# Altium PCB er9x.PcbDoc (part 1 of 2)
Units mm, origin at the board's own origin, x right, y up, seen from the top; angles counter-clockwise.
Board outline 182 x 126 mm, 2 copper layers (Top Layer, Bottom Layer); 144 components, 111 nets, 454 pads, 137 vias.
Unrouted connection lines stored in the file: 3.
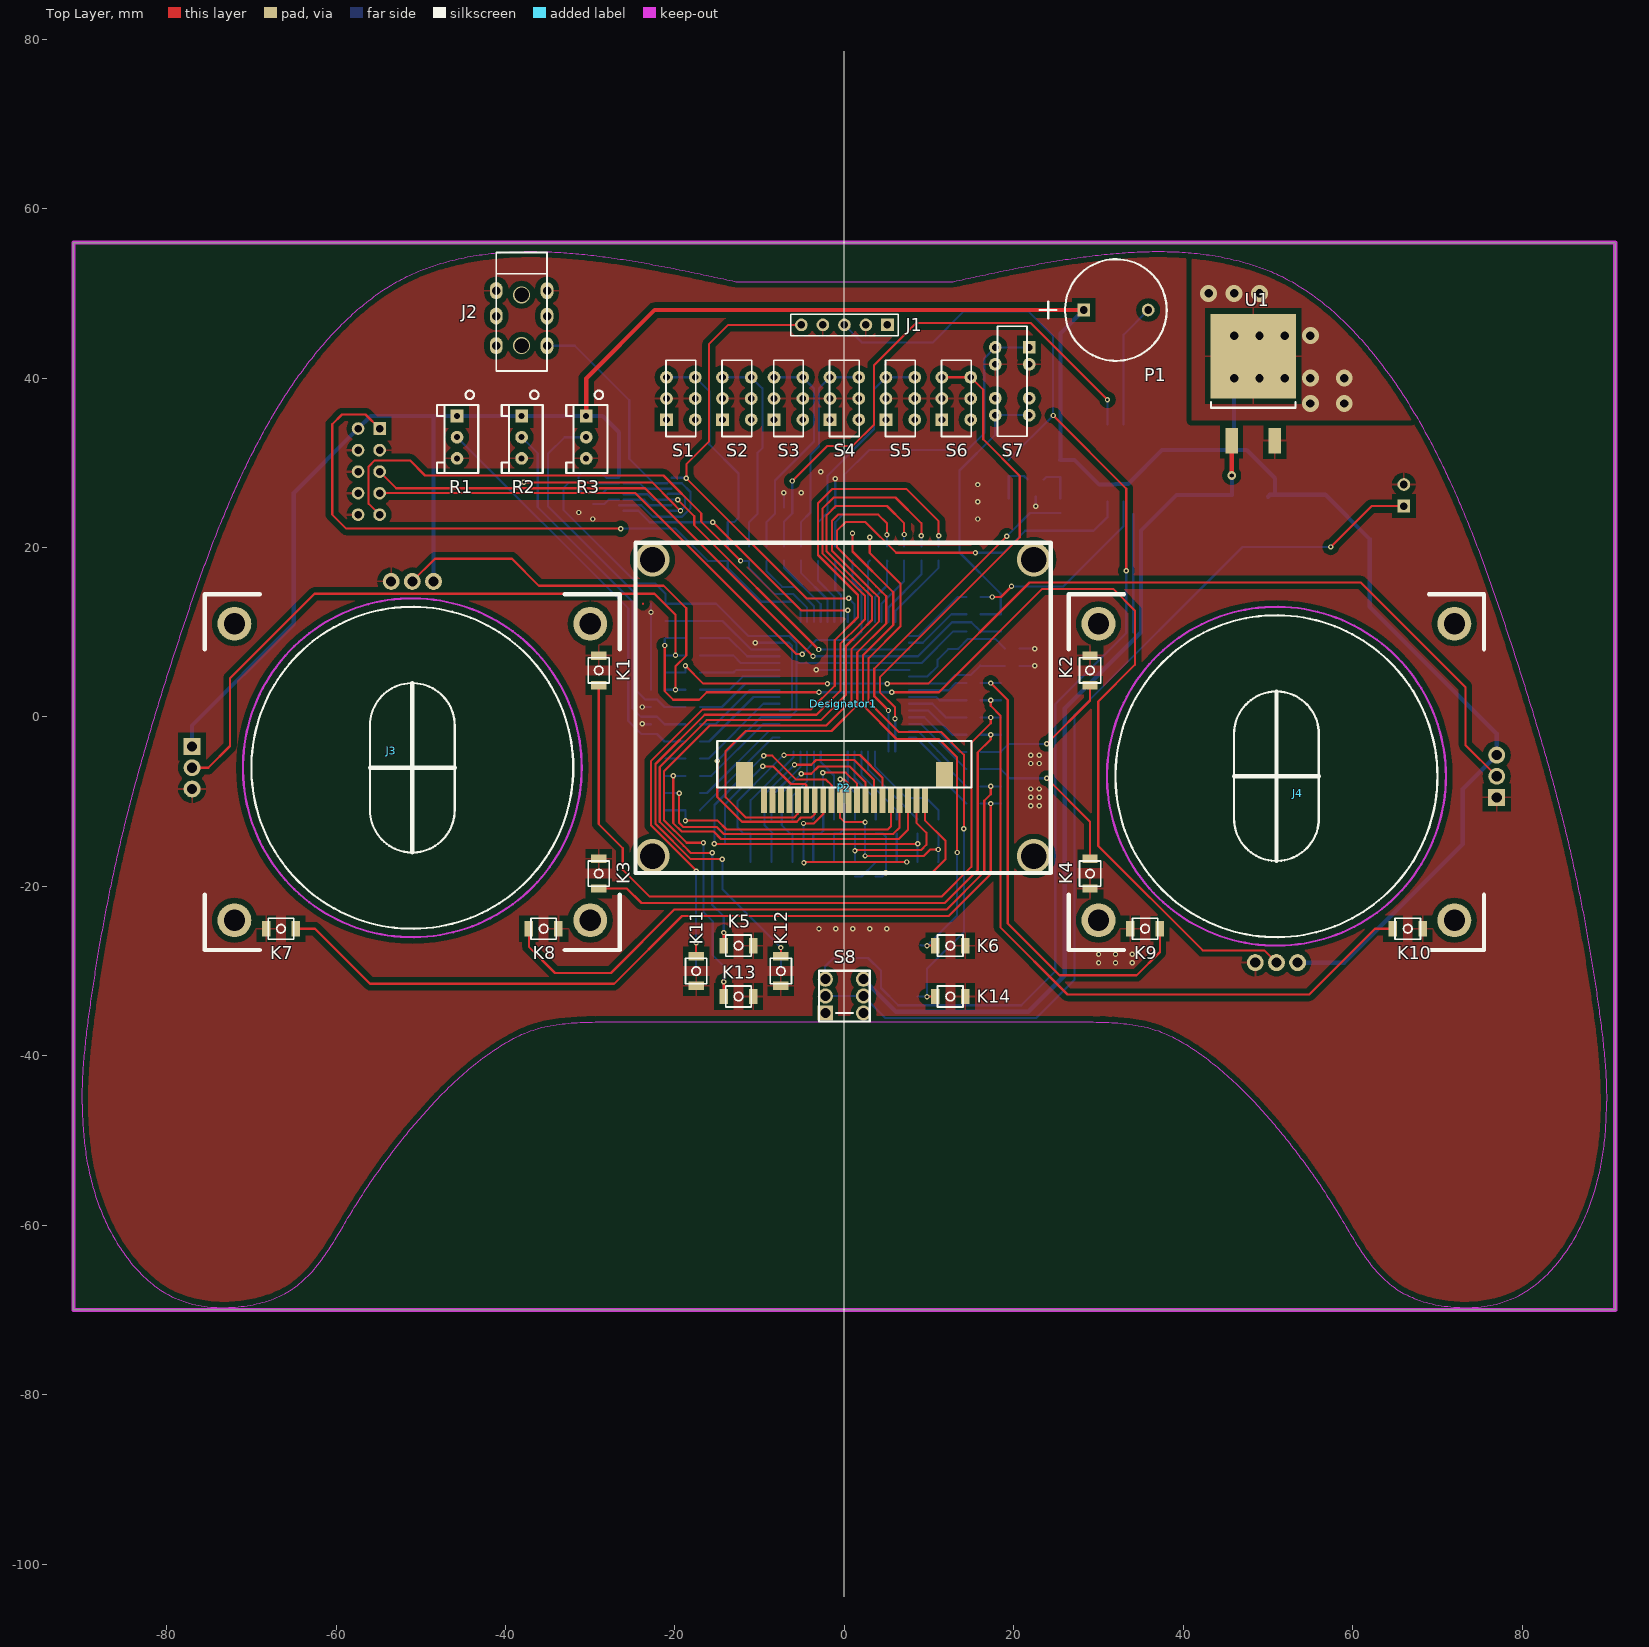
[diagram p0: Top Layer view]
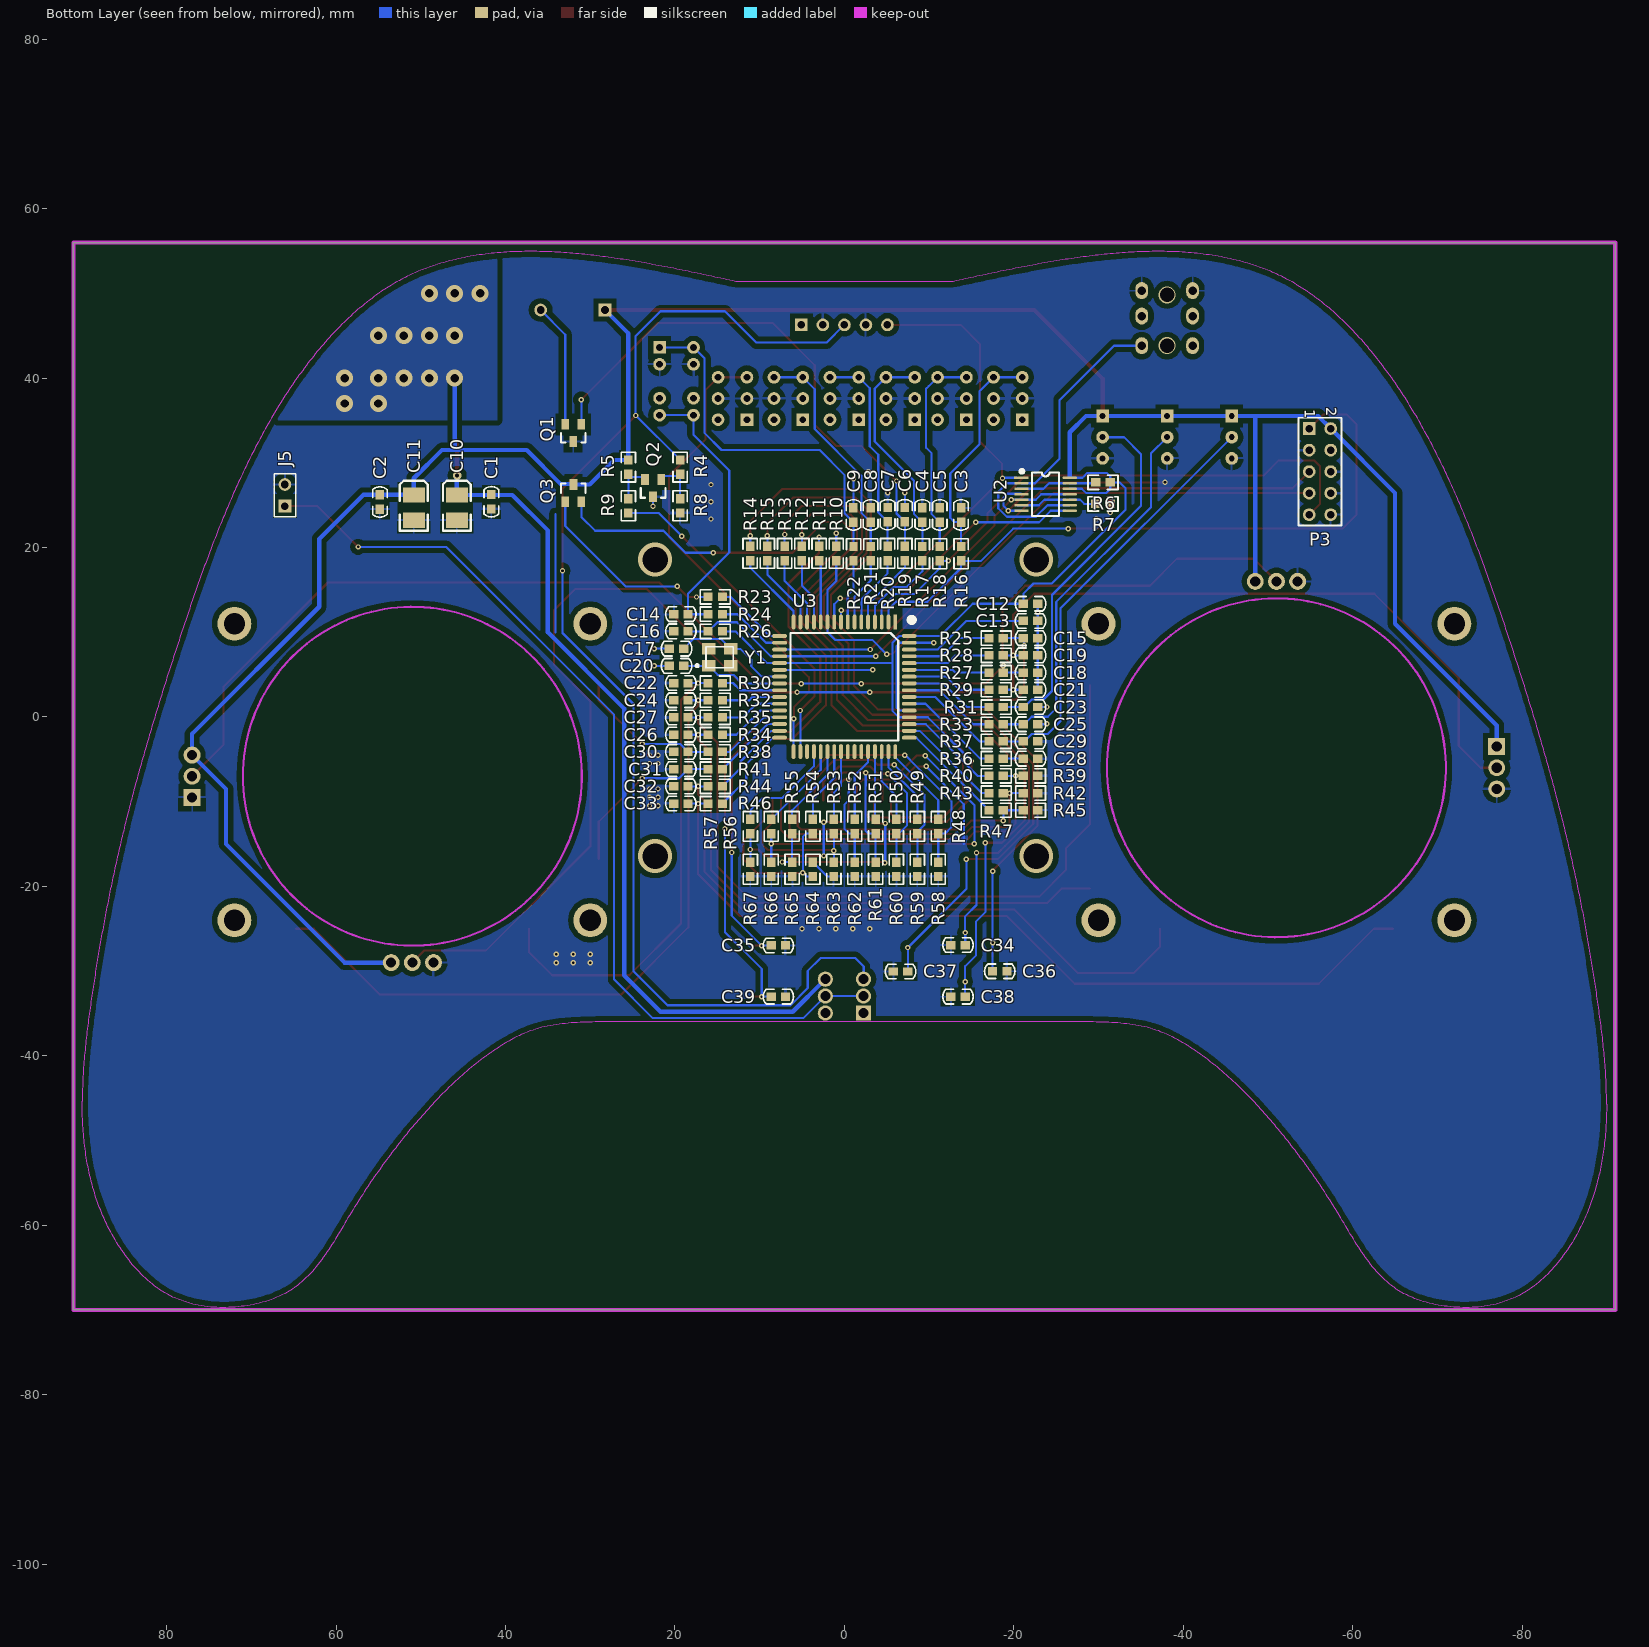
[diagram p1: Bottom Layer view, seen from below]

## Layer stack, top to bottom
Top Layer: signal copper 0.0356
Dielectric: dielectric 0.32, FR-4, Dk 4.8
Bottom Layer: signal copper 0.0356

## Board outline
-91,56 -91,-70 91,-70 91,56

## Design rules (kind name [scope] priority, off if disabled: settings)
Clearance Clearance_1 [InPolygon] p1: gap=0.635
Clearance [All] p2: gap=0.254
PolygonConnect PolygonConnect_1 [IsVia] p1: connectstyle=Direct reliefconductorwidth=0.254 reliefentries=4 polygonreliefangle="90 Angle"
PolygonConnect [All] p2: connectstyle=Relief reliefconductorwidth=0.254 reliefentries=4 polygonreliefangle="90 Angle"
RoomDefinition Sheet1 [InComponentClass('Sheet1')] p1: confinementstyle=ConfineIn formatcopy=TRUE lockcomponents=FALSE outline -1498.514,-1331.828 -1447.714,-1331.828 -1447.714,-1306.428 -1498.514,-1306.428
RoutingVias [All] p1: holewidth=0.711 width=1.27 viastyle="Through Hole" minholewidth=0.254 minwidth=0.254 maxholewidth=2.54 maxwidth=2.54
SilkscreenOverComponentPads [All] p1: minsilkscreentomaskgap=0.254
SolderMaskExpansion [All] p1: expansion=0.102
Width [All] p1: maxlimit=2.54 minlimit=0.254 preferedwidth=0.254
27 further rules are at their usual default settings.

## Components (designator, comment, footprint, x,y, rotation, side; value= is the part's Value field where it differs from the comment)
C1 "0.1uF" 0603C 41.671,25.4 r90 bottom (schematic designator C3)
C2 "0.1uF" 0603C 54.828,25.375 r90 bottom (schematic designator C4)
C3 "2.2uF" 0603C -13.772,23.844 r270 bottom (schematic designator C24)
C4 "2.2uF" 0603C -9.2,23.844 r270 bottom (schematic designator C26)
C5 "2.2uF" 0603C -11.257,23.844 r270 bottom (schematic designator C25)
C6 "2.2uF" 0603C -7.136,23.876 r270 bottom (schematic designator C27)
C7 "2.2uF" 0603C -5.104,23.876 r270 bottom (schematic designator C28)
C8 "2.2uF" 0603C -3.104,23.844 r270 bottom (schematic designator C29)
C9 "2.2uF" 0603C -1.072,23.844 r270 bottom (schematic designator C31)
C10 "4.7uF" B 45.749,24.708 r90 bottom (schematic designator C1)
C11 "4.7uF" B 50.829,24.708 r90 bottom (schematic designator C2)
C12 "0.1uF" 0603C -21.976,13.364 r0 bottom (schematic designator C15)
C13 "0.1uF" 0603C -21.976,11.332 r0 bottom (schematic designator C19)
C14 "2.2uF" 0603C 19.304,12.128 r180 bottom (schematic designator C30)
C15 "2.2uF" 0603C -21.976,9.3 r0 bottom (schematic designator C11)
C16 "0.1uF" 0603C 19.304,10.096 r180 bottom (schematic designator C12)
C17 "30pF" 0603C 19.812,8.064 r0 bottom
C18 "2.2uF" 0603C -21.976,5.236 r0 bottom (schematic designator C14)
C19 "2.2uF" 0603C -21.976,7.268 r0 bottom (schematic designator C13)
C20 "30pF" 0603C 19.812,6.032 r180 bottom (schematic designator C22)
C21 "2.2uF" 0603C -21.976,3.204 r0 bottom (schematic designator C16)
C22 "2.2uF" 0603C 19.304,4 r180 bottom (schematic designator C32)
C23 "2.2uF" 0603C -21.976,1.172 r0 bottom (schematic designator C18)
C24 "2.2uF" 0603C 19.304,1.968 r180 bottom (schematic designator C33)
C25 "2.2uF" 0603C -21.976,-0.86 r0 bottom (schematic designator C20)
C26 "2.2uF" 0603C 19.304,-2.096 r180 bottom (schematic designator C35)
C27 "2.2uF" 0603C 19.304,-0.064 r180 bottom (schematic designator C34)
C28 "2.2uF" 0603C -21.976,-4.924 r0 bottom (schematic designator C23)
C29 "2.2uF" 0603C -21.976,-2.892 r0 bottom (schematic designator C21)
C30 "2.2uF" 0603C 19.304,-4.128 r180 bottom (schematic designator C36)
C31 "2.2uF" 0603C 19.304,-6.16 r180 bottom (schematic designator C37)
C32 "2.2uF" 0603C 19.304,-8.192 r180 bottom (schematic designator C38)
C33 "2.2uF" 0603C 19.304,-10.224 r180 bottom (schematic designator C39)
C34 "2.2uF" 0603C -13.411,-26.924 r0 bottom (schematic designator C8)
C35 "2.2uF" 0603C 7.798,-26.975 r180 bottom (schematic designator C5)
C36 "2.2uF" 0603C -18.339,-30.023 r180 bottom (schematic designator C10)
C37 "2.2uF" 0603C -6.629,-30.048 r0 bottom (schematic designator C9)
C38 "2.2uF" 0603C -13.411,-33.02 r0 bottom (schematic designator C7)
C39 "2.2uF" 0603C 7.798,-33.02 r180 bottom (schematic designator C6)
Designator1 "Comment" LCD3 -0.152,1.575 r180 top locked
J1 "RF" HDR1X5 5.08,46.279 r180 top (schematic designator J6)
J2 "TRAINER" PJ-393 -38.1,52.324 r270 top (schematic designator J5)
J3 "Joystick" BIG -51,-6 r180 top locked (schematic designator J1)
J4 "Joystick" BIG 51,-7 r0 top locked (schematic designator J2)
J5 "BAT" HDR1X2 66.04,24.892 r90 bottom (schematic designator J7)
K1 "SW-PB" KEY -29,5.5 r90 top (schematic designator K2)
K2 "SW-PB" KEY 29,5.5 r90 top (schematic designator K1)
K3 "SW-PB" KEY -29,-18.5 r270 top
K4 "SW-PB" KEY 29,-18.5 r90 top
K5 "SW-PB" KEY -12.5,-27 r0 top (schematic designator K9)
K6 "SW-PB" KEY 12.5,-27 r0 top (schematic designator K10)
K7 "SW-PB" KEY -66.5,-25 r180 top (schematic designator K5)
K8 "SW-PB" KEY -35.5,-25 r180 top (schematic designator K6)
K9 "SW-PB" KEY 35.5,-25 r0 top (schematic designator K7)
K10 "SW-PB" KEY 66.5,-25 r0 top (schematic designator K8)
K11 "SW-PB" KEY -17.5,-30 r270 top (schematic designator K12)
K12 "SW-PB" KEY -7.5,-30 r270 top (schematic designator K11)
K13 "SW-PB" KEY -12.5,-33 r0 top (schematic designator K14)
K14 "SW-PB" KEY 12.5,-33 r0 top (schematic designator K13)
P1 "BEEP" BEEP 32.055,48.031 r90 top (schematic designator P5)
P2 "LCD" FPC 0,-8.331 r180 top locked (schematic designator P3)
P3 "Header 5X2" HDR2X5 -54.864,34.036 r270 bottom (schematic designator P4)
Q1 "NPN" SOT-23 32.004,33.528 r90 bottom (schematic designator Q3)
Q2 "NPN" SOT-23 22.58,27.01 r90 bottom
Q3 "PNP" SOT-23 32.004,26.416 r270 bottom (schematic designator Q1)
R1 "RPot SM" 3296 -45.72,33.02 r270 top
R2 "RPot SM" 3296 -38.1,33.02 r270 top (schematic designator R3)
R3 "RPot SM" 3296 -30.48,33.02 r270 top (schematic designator R2)
R4 "150K" 0603R 19.392,29.49 r270 bottom (schematic designator R50)
R5 "10K" 0603R 25.488,29.49 r90 bottom (schematic designator R42)
R6 "200R" 0603R -30.528,27.686 r180 bottom (schematic designator R70)
R7 "200R" 0603R -30.528,25.146 r180 bottom (schematic designator R71)
R8 "100K" 0603R 19.392,24.918 r270 bottom (schematic designator R56)
R9 "0R" 0603R 25.488,24.918 r90 bottom (schematic designator R49)
R10 "200R" 0603R 0.96,19.304 r90 bottom (schematic designator R32)
R11 "200R" 0603R 2.992,19.304 r90 bottom (schematic designator R34)
R12 "200R" 0603R 5.024,19.304 r90 bottom (schematic designator R36)
R13 "200R" 0603R 7.056,19.304 r90 bottom (schematic designator R38)
R14 "200R" 0603R 11.12,19.304 r90 bottom (schematic designator R41)
R15 "200R" 0603R 9.088,19.304 r90 bottom (schematic designator R39)
R16 "200R" 0603R -13.772,19.272 r270 bottom (schematic designator R40)
R17 "200R" 0603R -9.204,19.276 r270 bottom (schematic designator R45)
R18 "200R" 0603R -11.261,19.276 r270 bottom (schematic designator R43)
R19 "1K" 0603R -7.136,19.304 r270 bottom (schematic designator R46)
R20 "200R" 0603R -5.104,19.304 r270 bottom (schematic designator R48)
R21 "200R" 0603R -3.108,19.276 r270 bottom (schematic designator R51)
R22 "200R" 0603R -1.076,19.276 r270 bottom (schematic designator R52)
R23 "200R" 0603R 15.24,14.16 r0 bottom (schematic designator R44)
R24 "200R" 0603R 15.24,12.128 r0 bottom (schematic designator R53)
R25 "200R" 0603R -17.912,9.3 r0 bottom (schematic designator R57)
R26 "10K" 0603R 15.24,10.096 r0 bottom (schematic designator R17)
R27 "200R" 0603R -17.912,5.236 r0 bottom (schematic designator R60)
R28 "200R" 0603R -17.912,7.268 r0 bottom (schematic designator R58)
R29 "200R" 0603R -17.912,3.204 r0 bottom (schematic designator R62)
R30 "200R" 0603R 15.24,4 r180 bottom (schematic designator R24)
R31 "200R" 0603R -17.912,1.172 r0 bottom (schematic designator R64)
R32 "200R" 0603R 15.24,1.968 r180 bottom (schematic designator R26)
R33 "200R" 0603R -17.912,-0.86 r0 bottom (schematic designator R66)
R34 "200R" 0603R 15.24,-2.096 r180 bottom (schematic designator R29)
R35 "200R" 0603R 15.24,-0.064 r180 bottom (schematic designator R28)
R36 "200R" 0603R -17.912,-4.924 r0 bottom (schematic designator R69)
R37 "200R" 0603R -17.912,-2.892 r0 bottom (schematic designator R68)
R38 "200R" 0603R 15.24,-4.128 r180 bottom (schematic designator R31)
R39 "10K" 0603R -21.976,-6.956 r180 bottom (schematic designator R4)
R40 "200R" 0603R -17.912,-6.956 r180 bottom (schematic designator R18)
R41 "200R" 0603R 15.24,-6.16 r180 bottom (schematic designator R33)
R42 "10K" 0603R -21.976,-8.988 r180 bottom (schematic designator R5)
R43 "200R" 0603R -17.912,-8.988 r180 bottom (schematic designator R19)
R44 "200R" 0603R 15.24,-8.192 r180 bottom (schematic designator R35)
R45 "10K" 0603R -21.976,-11.02 r180 bottom (schematic designator R6)
R46 "200R" 0603R 15.24,-10.224 r180 bottom (schematic designator R37)
R47 "200R" 0603R -17.912,-11.02 r180 bottom (schematic designator R20)
R48 "200R" 0603R -11.074,-12.924 r270 bottom (schematic designator R21)
R49 "200R" 0603R -8.61,-12.924 r270 bottom (schematic designator R22)
R50 "200R" 0603R -6.146,-12.924 r270 bottom (schematic designator R23)
R51 "200R" 0603R -3.682,-12.924 r270 bottom (schematic designator R25)
R52 "200R" 0603R -1.218,-12.924 r270 bottom (schematic designator R27)
R53 "200R" 0603R 1.245,-12.924 r270 bottom (schematic designator R67)
R54 "200R" 0603R 3.709,-12.924 r270 bottom (schematic designator R65)
R55 "200R" 0603R 6.173,-12.924 r270 bottom (schematic designator R63)
R56 "200R" 0603R 8.637,-12.924 r270 bottom (schematic designator R61)
R57 "200R" 0603R 11.101,-12.924 r270 bottom (schematic designator R59)
R58 "10K" 0603R -11.074,-17.988 r270 bottom (schematic designator R7)
R59 "10K" 0603R -8.61,-17.988 r270 bottom (schematic designator R8)
R60 "10K" 0603R -6.146,-17.988 r270 bottom (schematic designator R9)
R61 "10K" 0603R -3.682,-17.988 r270 bottom (schematic designator R10)
R62 "10K" 0603R -1.218,-17.988 r270 bottom (schematic designator R11)
R63 "10K" 0603R 1.245,-17.988 r270 bottom (schematic designator R16)
R64 "10K" 0603R 3.709,-17.988 r90 bottom (schematic designator R15)
R65 "10K" 0603R 6.173,-17.988 r270 bottom (schematic designator R14)
R66 "10K" 0603R 8.637,-17.988 r270 bottom (schematic designator R13)
R67 "10K" 0603R 11.101,-17.988 r270 bottom (schematic designator R12)
S1 "THR" 2235D -19.304,37.592 r0 top (schematic designator S5)
S2 "AIL" 2235D -12.7,37.592 r0 top (schematic designator S1)
S3 "ELE" 2235D -6.604,37.592 r0 top
S4 "GER" 2235D 0,37.592 r0 top (schematic designator S2)
S5 "TRN" 2235D 6.604,37.592 r0 top (schematic designator S6)
S6 "RDU" 2235D 13.208,37.592 r0 top (schematic designator S4)
S7 "ID" 2336D 19.812,39.624 r270 top
S8 "SW7" LOCK 0,-32.952 r180 top
U1 "7805" TO-263 48.26,37.592 r270 top locked (schematic designator U2)
U2 "HC4066" TSSOP-14 -23.749,26.289 r270 bottom (schematic designator U4)
U3 "ATmega128A" LQFP-64 0,3.556 r0 bottom locked
Y1 "16Mhz" 3225 14.732,7.048 r180 bottom

## Footprints (in the part's own frame and the unit in brackets; to place one, negate y for a bottom-side part, rotate by r counter-clockwise, add the part's x,y. Pads: shape width x height; smd on the part's side, far side on the other; paste and mask are expansions set on the pad)
0603C [mm]
  rect 1.1x1 smd: 1(0.85,0) 2(-0.85,0)
  silkscreen extent -1.79,-0.86 1.79,0.86
0603R [mm]
  rect 1.1x1 smd: 1(0.85,0) 2(-0.85,0)
  silkscreen extent -1.77,-0.84 1.77,0.84
2235D [mm]
  rect 1.5x1.5 hole 0.8: 1(-1.7,-2.5)
  round 1.5 hole 0.8: 1(1.7,-2.5) 2(-1.7,0) 2(1.7,0) 3(-1.7,2.5) 3(1.7,2.5)
  silkscreen extent -1.75,-4.5 1.75,4.5
2336D [mm]
  rect 1.5x1.5 hole 0.8: 1(-4,2)
  round 1.5 hole 0.8: 1(-4,-2) 2(-2,2) 2(-2,-2) 3(2,2) 3(2,-2) 4(4,2) 4(4,-2)
  silkscreen extent -6.5,-1.75 6.5,1.75
3225 [mm]
  rect 1.6x1.4 smd: 1(-1.3,-1) 2(1.3,-1) 3(1.3,1) 4(-1.3,1)
  silkscreen extent -2.8,-1.25 1.6,1.25
3296 [mm]
  rect 1.5x1.5 hole 0.7: 1(-2.5,0)
  round 1.5 hole 0.7: 2(0,0) 3(2.5,0)
  silkscreen extent -5.5,-2.35 4.21,2.5
B [mm]
  rect 1.8x2.6 smd: 1(1.5,0) 2(-1.5,0)
  silkscreen extent -2.73,-1.65 3.16,1.65
BEEP [mm]
  rect 1.5x1.5 hole 0.9: 1(0,3.8)
  round 1.5 hole 0.9: 2(0,-3.8)
  silkscreen extent -6,-6 6,9
BIG [mm]
  round 4 hole 2.5: 0(-21,18) 0(-21,-17) 0(21,18) 0(21,-17)
  rect 2x2 hole 1.2: 1(26,-2.5)
  round 2 hole 1.2: 2(26,0) 3(26,2.5) 4(2.5,-22) 5(0,-22) 6(-2.5,-22)
  Keep-Out Layer circle w0.254: c0,0 r20
  silkscreen extent -24.5,-20.5 24.5,21.5
FPC [mm]
  rect 2x3 smd: 0(-11.8,-1.5) 0(11.8,-1.5)
  rect 0.7x3 smd: 1(9.5,1.5) 2(8.5,1.5) 3(7.5,1.5) 4(6.5,1.5) 5(5.5,1.5) 6(4.5,1.5) 7(3.5,1.5) 8(2.5,1.5) 9(1.5,1.5) 10(0.5,1.5) 11(-0.5,1.5) 12(-1.5,1.5) 13(-2.5,1.5) 14(-3.5,1.5) 15(-4.5,1.5) 16(-5.5,1.5) 17(-6.5,1.5) 18(-7.5,1.5) 19(-8.5,1.5) 20(-9.5,1.5)
  silkscreen extent -15,-5.5 15,0
HDR1X2 [mm] "Connector; Header; 2 Position"
  rect 1.5x1.5 hole 0.9: 1(0,0)
  round 1.5 hole 0.9: 2(2.54,0)
  silkscreen extent -1.27,-1.27 3.81,1.27
HDR1X5 [mm] "Connector; Header; 5 Position"
  rect 1.5x1.5 hole 0.9: 1(0,0)
  round 1.5 hole 0.9: 2(2.54,0) 3(5.08,0) 4(7.62,0) 5(10.16,0)
  silkscreen extent -1.27,-1.27 11.43,1.27
HDR2X5 [mm] "Connector; Header; 5x2 Position"
  rect 1.5x1.5 hole 0.9: 1(0,0)
  round 1.5 hole 0.9: 2(0,2.54) 3(2.54,0) 4(2.54,2.54) 5(5.08,0) 6(5.08,2.54) 7(7.62,0) 8(7.62,2.54) 9(10.16,0) 10(10.16,2.54)
  silkscreen extent -1.27,-1.27 11.43,3.81
KEY [mm]
  rect 1x1.8 smd: 1(-1.75,0) 2(1.75,0)
  silkscreen extent -1.5,-1.25 1.5,1.25
LCD3 [mm]
  silkscreen extent -24.5,-19 24.5,20
LOCK [mm]
  rect 1.8x1.8 hole 1.2: 1(2.25,2)
  round 1.8 hole 1.2: 2(2.25,0) 3(2.25,-2) 4(-2.25,2) 5(-2.25,0) 6(-2.25,-2)
  silkscreen extent -3,-3 3,3
LQFP-64 [mm]
  rect 0.45x1.75 smd: 1(-6,-7.65)
  oval 0.45x1.75 smd: 2(-5.2,-7.65) 3(-4.4,-7.65) 4(-3.6,-7.65) 5(-2.8,-7.65) 6(-2,-7.65) 7(-1.2,-7.65) 8(-0.4,-7.65) 9(0.4,-7.65) 10(1.2,-7.65) 11(2,-7.65) 12(2.8,-7.65) 13(3.6,-7.65) 14(4.4,-7.65) 15(5.2,-7.65) 16(6,-7.65) 33(6,7.65) 34(5.2,7.65) 35(4.4,7.65) 36(3.6,7.65) 37(2.8,7.65) 38(2,7.65) 39(1.2,7.65) 40(0.4,7.65) 41(-0.4,7.65) 42(-1.2,7.65) 43(-2,7.65) 44(-2.8,7.65) 45(-3.6,7.65) 46(-4.4,7.65) 47(-5.2,7.65) 48(-6,7.65)
  oval 1.75x0.45 smd: 17(7.65,-6) 18(7.65,-5.2) 19(7.65,-4.4) 20(7.65,-3.6) 21(7.65,-2.8) 22(7.65,-2) 23(7.65,-1.2) 24(7.65,-0.4) 25(7.65,0.4) 26(7.65,1.2) 27(7.65,2) 28(7.65,2.8) 29(7.65,3.6) 30(7.65,4.4) 31(7.65,5.2) 32(7.65,6) 49(-7.65,6) 50(-7.65,5.2) 51(-7.65,4.4) 52(-7.65,3.6) 53(-7.65,2.8) 54(-7.65,2) 55(-7.65,1.2) 56(-7.65,0.4) 57(-7.65,-0.4) 58(-7.65,-1.2) 59(-7.65,-2) 60(-7.65,-2.8) 61(-7.65,-3.6) 62(-7.65,-4.4) 63(-7.65,-5.2) 64(-7.65,-6)
  silkscreen extent -8.25,-8.2 6.35,6.35
PJ-393 [mm]
  oval 2x1.5 hole 1: 1(8.5,-3) 1(8.5,3) 2(5,3) 2(5,-3) 3(2,3) 3(2,-3)
  silkscreen extent -2.5,-3 11.5,3
SOT-23 [mil]
  rect 50x36 smd: 1(40,-37.5) 2(40,37.5) 3(-40,0.5)
  silkscreen extent -45,-58 0,58
TO-263 [mm]
  rect 3x1.5 smd: 1(5,-2.54) 3(5,2.54)
  rect 10x10.1 smd: 2(-5,0)
  silkscreen extent 0.4,-5 1.1,5
TSSOP-14 [mm]
  rect 0.32x1.7 smd: 1(-1.95,-2.85)
  oval 0.32x1.7 smd: 2(-1.3,-2.85) 3(-0.65,-2.85) 4(0,-2.85) 5(0.65,-2.85) 6(1.3,-2.85) 7(1.95,-2.85) 8(1.95,2.85) 9(1.3,2.85) 10(0.65,2.85) 11(0,2.85) 12(-0.65,2.85) 13(-1.3,2.85) 14(-1.95,2.85)
  silkscreen extent -2.9,-3 2.55,1.6

## Part data
C1 C2 C17 C20: library part CAP, "Capacitor"
C3 C4 C5 C6 C7 C8 C9 C12 C13 C14 C15 C18 C19 C21 C22 C23 C24 C25 C26 C27 C28 C29 C30 C31 C32 C33 C34 C35 C36 C37 C38 C39: library part Cap, "Capacitor"
C10 C11 C16: library part "Cap Pol1", "Polarized Capacitor (Radial)"
J1: library part "Header 5", "Header, 5-Pin"
J2: library part "Header 3", "Header, 3-Pin"
J3 J4: library part "RPot SM_1", "Square Trimming Potentiometer"
J5: library part "Header 2", "Header, 2-Pin"
K1 K2 K3 K4 K5 K6 K7 K8 K9 K10 K11 K12 K13 K14: "Switch"
P1: library part Speaker, "Loudspeaker"
P2: library part "Header 20", "Header, 20-Pin"
P3: "Header, 5-Pin, Dual row"
Q1 Q2: "NPN Bipolar Transistor"
Q3: "PNP Bipolar Transistor"
R1 R2 R3: "Square Trimming Potentiometer"
R4 R5 R6 R7 R8 R9 R10 R11 R12 R13 R14 R15 R16 R17 R18 R19 R20 R21 R22 R23 R24 R25 R26 R27 R28 R29 R30 R31 R32 R33 R34 R35 R36 R37 R38 R39 R40 R41 R42 R43 R44 R45 R46 R47 R48 R49 R50 R51 R52 R53 R54 R55 R56 R57 R58 R59 R60 R61 R62 R63 R64 R65 R66 R67: library part Res2, "Resistor"
S1 S2 S3 S4 S5 S6 S8: library part SW-SPDT, "SPDT Subminiature Toggle Switch, Right Angle Mounting, Vertical Actuation"
S7: library part "SW DPDT", "Switch"
U1: "Header, 3-Pin, Dual row"
U3: library part ATmega128L-8MC, "8-Bit AVR Microcontroller with 128K Bytes of In-System Programmable Flash Memory"
Y1: library part XTAL, "Crystal Oscillator"

## Via types
v1: diameter 0.635, hole 0.305, Top Layer to Bottom Layer, 83 vias
v2: diameter 0.635, hole 0.305, Top Layer to Bottom Layer, tented both sides, 33 vias
v3: diameter 2, hole 1, Top Layer to Bottom Layer, tented both sides, 13 vias
v4: diameter 4, hole 3, Top Layer to Bottom Layer, 4 vias
v5: diameter 2, hole 1.7, Top Layer to Bottom Layer, 2 vias
v6: diameter 1.016, hole 0.508, Top Layer to Bottom Layer, 1 vias
v7: diameter 2, hole 1, Top Layer to Bottom Layer, 1 vias

## Nets (pads, with @x,y where several pads share a name; then routed paths per layer and width w, separated by ;. In a path a pad name is that pad's centre, name@x,y a point inside that pad or via, vN(x,y) a via of type N, cw(c..) or ccw(c..) an arc to the next point about the centre after c; other vN are vias at no path point)
AILDRSW: C5.1 R18.2 S2.3 | length 25
  Bottom Layer w0.254: S2.3@-14.4,40.092 S2.3@-11,40.092 -9.954,39.046 ; R18.2@-11.261,20.126 -11.261,22.99 C5.1@-11.257,22.994 -10.262,23.99 -10.262,31.166 -9.652,31.775 -9.652,38.744 -9.954,39.046 ; -9.7,38.792 -9.954,39.046
ANT: J1.1
BACKLIGHT: Q3.1 R23.1 | length 23.3
  Top Layer w0.254: v1(17.462,14.16) 18.478,14.16 v1(19.724,15.406) v1@19.812,15.494
  Bottom Layer w0.254: R23.1@16.09,14.16 v1(17.462,14.16) ; v1(19.724,15.406) 25.82,15.406 32.956,22.543 Q3.1@32.956,25.4
BATTERY: C28.1 R36.2 | length 2.4
  Bottom Layer w0.254: C28.1@-21.126,-4.924 R36.2@-18.762,-4.924
BUZZER: C6.1 Q1.1 R19.2 | length 63.8
  Top Layer w0.254: v1(-6.147,27.853) -2,32 1,32 3.5,34.5 3.5,41.524 8.476,46.5 22,46.5 v1(31.051,37.449)
  Bottom Layer w0.254: R19.2@-7.136,20.154 C6.1@-7.136,23.026 -6.147,24.015 v1(-6.147,27.853) ; Q1.1@31.051,34.544 v1(31.051,37.449)
CHARBE: S8.4
DOWN: C38.2 K13.1 R12.1 | length 92.7
  Top Layer w0.254: v1@-16.891,-14.859 -18.607,-14.859 -21.285,-12.181 -21.285,-6.426 -15.875,-1.016 -2.159,-1.016 0.857,2 ; K13.1@-14.25,-33 v1(-14.25,-31.243) ; 0.857,2.116 0.857,8.039 4.102,11.284 4.102,12.192 4.102,14.055 3.11,15.048 ; 3.316,14.841 3.11,15.048 ; v1(5.024,21.519) 5.024,22.86 4.008,23.876 -0.762,23.876 -1.467,23.171 -1.467,19.625 3.11,15.048
  Bottom Layer w0.254: v1(-16.637,-14.859) -16.637,-23.038 -15.545,-24.13 -15.545,-28.118 -14.25,-29.413 v1(-14.25,-31.243) -14.25,-33.009 C38.2@-14.261,-33.02 ; R12.1@5.024,20.154 v1(5.024,21.519)
ELEDRSW: C4.1 R17.2 S3.3 | length 26.2
  Bottom Layer w0.254: R17.2@-9.2,20.13 C4.1@-9.2,22.994 -8.2,23.994 -8.2,27.9 -3.581,32.519 -3.581,38.769 S3.3@-4.904,40.092 S3.3@-8.304,40.092
EXIT: C39.2 K14.1 R11.1 | length 71.9
  Top Layer w0.254: v1(2.992,21.209) 2.992,19.36 6.604,15.748 6.604,10.668 2.857,6.921 2.857,1.798 4.535,0.12 ; 3.048,1.607 4.535,0.12 ; v1(9.754,-33.02) 10.73,-33.02 K14.1@10.75,-33 ; v1(14.1,-13.2) 14.1,-4.448 11.43,-1.778 6.433,-1.778 4.535,0.12
  Bottom Layer w0.254: R11.1@2.992,20.154 v1(2.992,21.209) ; C39.2@8.648,-33.02 v1(9.754,-33.02) 9.754,-29.743 14.1,-25.397 v1(14.1,-13.2)
EXT_PWR: J5.1 S8.2 S8.5 | length 112.8
  Top Layer w0.254: v1(57.404,20.066) 62.23,24.892 J5.1@66.04,24.892
  Bottom Layer w0.254: S8.2@-2.286,-32.766 -2.1,-32.952 S8.5@2.25,-32.952 4.854,-35.555 22.611,-35.555 27.178,-30.988 27.178,0.254 46.99,20.066 v1(57.404,20.066)
GEARSW: C7.1 R20.2 S4.3 | length 24.7
  Bottom Layer w0.254: R20.2@-5.104,20.154 C7.1@-5.104,23.026 -4,24.13 -4,30.95 -2.992,31.958 -2.992,38.8 S4.3@-1.7,40.092 S4.3@1.7,40.092
GND: C1.2 C2.2 C3.2 C4.2 C5.2 C6.2 C7.2 C8.2 C9.2 C10.2 C11.2 C12.2 C13.2 C14.2 C15.2 C16.2 C17.1 C18.2 C19.2 C20.2 C21.2 C22.2 C23.2 C24.2 C25.2 C26.2 C27.2 C28.2 C29.2 C30.2 C31.2 C32.2 C33.2 C34.1 C35.1 C36.1 C37.1 C38.1 C39.1 J1.2 J1.4 J2.3 J3.3 J3.4 J4.1 J4.6 J5.2 K1.2 K2.2 K3.1 K4.1 K5.2 K6.2 K7.2 K8.1 K9.1 K10.2 K11.2 K12.2 K13.2 K14.2 P2.6 P3.3 P3.4 P3.6 P3.8 P3.10 Q1.3 Q2.3 R1.3 R2.3 R3.3 R7.1 R8.1 R39.1 R42.1 R45.1 R58.1 R59.1 R60.1 R61.1 R62.1 R63.1 R64.1 R65.1 R66.1 R67.1 S1.2 S2.2 S3.2 S4.2 S5.2 S6.2 S7.2 U1.3 U2.4 U2.7 U3.22 U3.53 U3.63 | length 95.7
  Top Layer w0.254: v1@-37.749,27.589 v1(-37.846,27.686) -22.696,27.686 -20.383,25.373 -20.383,25.365 -19.358,24.339 v2(-19.349,24.339) ; -23.778,13.364 -23.756,13.386 ; v1@-9.519,-5.975 v1(-9.652,-5.842) -8.382,-5.842 -6.312,-7.912 -4.659,-7.912 -4.5,-8.071 P2.6@-4.5,-9.831 -4.5,-8.327
  Bottom Layer w0.254: v1(-23.876,-0.813) -23.829,-0.86 C25.2@-22.826,-0.86 ; v1(-23.872,1.172) C23.2@-22.826,1.172 ; C21.2@-22.826,3.204 C18.2@-22.826,5.236 C19.2@-22.826,7.268 C15.2@-22.826,9.3 C13.2@-22.826,11.332 C12.2@-22.826,13.364 ; U2.7@-20.899,24.339 v2(-19.349,24.339) -18.796,24.892 -18.796,25.908 -19.241,26.352 -20.836,26.352 U2.4@-20.899,26.289 ; -14.097,-15 -14.097,-10.287 v1(-9.652,-5.842) ; v2(-10.541,8.763) -7.657,8.763 U3.63@-7.65,8.756 -6.546,8.756 -6.172,8.382 -6.172,1.067 -6.483,0.756 U3.53@-7.65,0.756 ; C6.2@-7.136,24.726 v2@-7.136,26.465 ; v1(-3.334,5.556) U3.22@7.65,5.556 ; C9.2@-1.072,24.694 v1@-1.072,27.884 ; R63.1@1.245,-18.838 2.009,-18.838 R64.1@3.709,-17.138 ; C20.2@20.662,6.032 v2@22.44,6.032 ; C17.1@20.662,8.064 v2@22.441,8.064 ; v1(22.593,24.879) Q2.3@22.593,25.994
  other v1: -22.826,12.344 -1.072,28.138
  other v2: 30,-29 32,-29 34,-29 30,-28 32,-28 34,-28 -3,-25 -1,-25 1,-25 3,-25 5,-25 22,-10.5 23,-10.5 22,-9.5 23,-9.5 22,-8.5 23,-8.5 22,-5.5 23,-5.5 22,-4.5 23,-4.5 22.454,6.045 22.454,8.052 -29.718,23.368 15.748,23.368 -31.369,24.13 15.748,25.4 -7.137,26.467 -5.105,26.467 15.748,27.432 -2.794,28.956
HOVPIT: C23.1 R3.2 R31.2 | length 44.2
  Bottom Layer w0.254: R3.2@-30.48,33.02 -33.02,33.02 -35,31.04 -35,24.891 -24.5,14.391 -24.5,3.053 -23.5,2.053 -22.118,2.053 -21.237,1.172 C23.1@-21.126,1.172 R31.2@-18.762,1.172
HOVTHR: C25.1 R2.2 R33.2 | length 44.5
  Bottom Layer w0.254: R2.2@-38.1,33.02 -36.195,31.115 -36.195,24.765 -25.008,13.578 -25.008,1.008 -24.021,0.021 -22.118,0.021 -21.237,-0.86 C25.1@-21.126,-0.86 R33.2@-18.762,-0.86
IDL1SW: C14.1 R24.1 S7.4 | length 33.6
  Bottom Layer w0.254: R24.1@16.09,12.128 C14.1@18.454,12.128 18.454,14.541 13.589,19.406 13.589,29.089 17.812,33.312 S7.4@17.812,35.624 S7.4@21.812,35.624
IDL2SW: C9.1 R22.2 S7.1 | length 42.1
  Bottom Layer w0.254: R22.2@-1.072,20.13 C9.1@-1.072,22.994 0,24.066 0,28.575 2.925,31.5 14.5,31.5 16.5,33.5 16.5,42.312 S7.1@17.812,43.624 S7.1@21.812,43.624
JACK_PPM: J2.1 U2.2 U2.9 | length 39
  Bottom Layer w0.254: J2.1@-35.1,43.824 -31.824,43.824 -25.4,37.4 -25.4,30.48 -22.509,27.589 U2.2@-20.899,27.589 ; U2.9@-26.599,24.989 -23.973,24.989 -22.606,23.622 -19.177,23.622 -18.161,24.638 -18.161,26.543 -19.207,27.589 U2.2@-20.391,27.589
LCDA0: P2.8 R55.1 R65.2 | length 25.8
  Top Layer w0.254: v1(-4.826,-12.573) -3.607,-12.573 -2.5,-11.466 P2.8@-2.5,-9.831 ; v1(-4.775,-17.221) -4.692,-17.138 4,-17.138 7.322,-17.138 v1(7.341,-17.12)
  Bottom Layer w0.254: v1(-4.826,-12.573) -4.826,-17.17 v1(-4.775,-17.221) ; R55.1@6.173,-13.774 R65.2@6.173,-17.138 6.191,-17.12 v1(7.341,-17.12)
LCDBL: P2.5 Q3.2 | length 97.4
  Top Layer w0.254: P2.5@-5.5,-9.831 -5.5,-11.428 -5.934,-11.862 -11.638,-11.862 -14.019,-9.481 -14.019,-4.019 -11.651,-1.651 -1.524,-1.651 1.524,1.397 1.524,7.62 4.936,11.032 4.936,14.241 3.746,15.43 ; 4.5,14.677 3.746,15.43 ; v1(15.469,19.38) 6.12,19.38 2.5,23 0.14,23 -0.889,21.971 -0.889,20.066 3.746,15.43
  Bottom Layer w0.254: v1(15.469,19.38) 18.76,19.38 21.351,21.971 29.413,21.971 31.051,23.609 Q3.2@31.051,25.4
LCDCS: P2.10 R57.1 R67.2 | length 25
  Top Layer w0.254: P2.10@-0.5,-9.831 -0.5,-11.895 0.025,-12.421 v1(2.438,-12.421) ; 5.817,-16.408 v1(2.438,-16.408) 9.373,-16.408 10.135,-15.646 v1(11.101,-15.646)
  Bottom Layer w0.254: v1(2.438,-16.408) 2.438,-15.646 v1(2.438,-12.421) ; R67.2@11.082,-17.12 R67.2@11.101,-17.138 R57.1@11.101,-13.774
LCDD0: P2.18 R39.2 R40.1 | length 40.4
  Top Layer w0.254: v1(-20.21,-6.956) -20.21,-12.538 -19.235,-13.513 -15.443,-13.513 -14.556,-14.4 6.4,-14.4 7.5,-13.3 P2.18@7.5,-9.831
  Bottom Layer w0.254: R39.2@-21.126,-6.956 v1(-20.21,-6.956) R40.1@-18.762,-6.956
LCDD1: P2.17 R42.2 R43.1 | length 35.3
  Top Layer w0.254: v1(-19.507,-8.992) -19.507,-12.522 -19.05,-12.979 -15.088,-12.979 -14.267,-13.8 5.766,-13.8 6.5,-13.066 P2.17@6.5,-9.831
  Bottom Layer w0.254: R42.2@-21.126,-8.988 v1@-19.533,-8.988 ; v1(-19.507,-8.992) -19.529,-8.992 v1@-19.533,-8.988 ; v1@-19.507,-8.988 v1@-19.533,-8.988
LCDD2: P2.16 R45.2 R47.1 | length 31.5
  Top Layer w0.254: v1(-18.762,-12.243) -14.961,-12.243 -13.911,-13.292 5.1,-13.292 5.5,-12.892 P2.16@5.5,-9.831
  Bottom Layer w0.254: R45.2@-21.126,-11.02 R47.1@-18.762,-11.02 v1(-18.762,-12.243)
LCDD3: P2.15 R48.1 R58.2 | length 31.4
  Top Layer w0.254: v1(-7.132,-4.5) 1.833,-4.5 4.5,-7.167 P2.15@4.5,-9.831
  Bottom Layer w0.254: R58.2@-11.074,-17.138 R48.1@-11.074,-13.774 -11.88,-13.774 -12.624,-13.03 -12.624,-9.957 -8.382,-5.715 v1@-7.149,-4.482
LCDD4: P2.14 R49.1 R59.2 | length 26.3
  Top Layer w0.254: v1(-5.892,-5.635) -3.901,-5.635 -3.346,-5.08 1.18,-5.08 3.5,-7.4 P2.14@3.5,-9.831
  Bottom Layer w0.254: R59.2@-8.61,-17.138 R49.1@-8.61,-13.774 ; R49.1@-8.521,-13.685 -9.443,-12.763 -9.443,-9.186 v1(-5.892,-5.635)
LCDD5: P2.13 R50.1 R60.2 | length 22.7
  Top Layer w0.254: v1(-5.105,-6.706) -3.912,-6.706 -3.048,-5.842 0.635,-5.842 2.5,-7.707 P2.13@2.5,-9.831
  Bottom Layer w0.254: R50.1@-6.4,-13.774 -7.4,-12.774 -7.4,-9 v1(-5.105,-6.706) ; R60.2@-6.146,-17.138 R50.1@-6.146,-13.774
LCDD6: P2.12 R51.1 R61.2 | length 18
  Top Layer w0.254: v1@-2.515,-6.579 0.179,-6.579 1.5,-7.9 P2.12@1.5,-9.831
  Bottom Layer w0.254: R61.2@-3.682,-17.138 R51.1@-3.682,-13.774 -2.844,-13.774 -2.5,-13.43 -2.5,-8.179 ; -2.515,-8.164 v1@-2.515,-6.579
  other v1: -2.54,-6.604
LCDD7: P2.11 R52.1 R62.2 | length 14
  Top Layer w0.254: v1(-0.508,-7.366) -0.008,-7.366 0.5,-7.874 P2.11@0.5,-9.831
  Bottom Layer w0.254: R62.2@-1.218,-17.138 R52.1@-1.218,-13.774 -0.591,-13.774 0,-13.183 0,-10.363 -0.508,-9.855 v1(-0.508,-7.366)
LCDEN: P2.19 R53.1 R63.2 | length 17.8
  Top Layer w0.254: v1(1.245,-15.799) 1.334,-15.71 9.028,-15.71 9.055,-15.71 9.677,-15.088 9.677,-13.665 8.5,-12.488 P2.19@8.5,-9.831
  Bottom Layer w0.254: R63.2@1.245,-17.138 v1(1.245,-15.799) R53.1@1.245,-13.774
LCDRST: P2.9 R56.1 R66.2 | length 51.6
  Top Layer w0.254: v1(-15.342,-14.986) v1@8.622,-14.986 ; v1(-9.525,-4.572) -8.509,-4.572 -5.677,-7.404 -2.172,-7.404 -1.5,-8.076 P2.9@-1.5,-9.831 ; v1@8.611,-15.138 v1@8.622,-14.986 ; v1@8.622,-14.985 8.624,-14.948 v1@8.637,-14.961 ; v1(8.637,-14.986) v1@8.622,-14.986
  Bottom Layer w0.254: v1(-15.342,-14.986) -15.342,-10.389 v1(-9.525,-4.572) ; R66.2@8.637,-17.138 v1(8.637,-14.986) R56.1@8.637,-13.774
LCDWR: P2.20 R54.1 R64.2 | length 22.7
  Top Layer w0.254: v1@4.902,-18.425 10.328,-18.425 11.939,-16.815 11.939,-14.631 9.5,-12.192 P2.20@9.5,-9.831
  Bottom Layer w0.254: R64.2@3.709,-18.838 4.445,-18.838 v1(4.902,-18.381) 4.902,-14.148 4.528,-13.774 R54.1@3.709,-13.774
LEFT: C36.2 K11.1 R14.1 | length 98
  Top Layer w0.254: K11.1@-17.5,-28.25 v1(-17.5,-26.644) ; v1(-17.5,-18.212) -17.5,-18.121 -22.809,-12.812 -22.809,-5.185 -16.735,0.889 -3.937,0.889 -1.143,3.683 -1.143,9.057 1.6,11.8 1.6,14.402 -3.108,19.11 -3.108,25.223 -1.407,26.924 7.31,26.924 11.12,23.114 v1(11.12,21.407)
  Bottom Layer w0.254: C36.2@-17.5,-29.983 v1(-17.5,-26.644) v1(-17.5,-18.212) ; R14.1@11.12,20.154 v1(11.12,21.407)
LHSTICK: C21.1 J3.5 R29.2 | length 48.4
  Top Layer w0.254: J3.5@-51,16 -48.331,18.669 -39.243,18.669 -36.068,15.494 -21.336,15.494 -18.669,12.827 -18.669,7.239 -19.939,5.969 v1(-19.939,3.204)
  Bottom Layer w0.254: C21.1@-21.126,3.204 v1(-19.939,3.204) R29.2@-18.762,3.204
LHTRIMDWN: C32.1 K8.2 R44.2 | length 74.9
  Top Layer w0.254: K8.2@-37.25,-25 -37.25,-27.139 -34.163,-30.226 -27.559,-30.226 -20.066,-22.733 12.065,-22.733 16.51,-18.288 16.51,-9.882 17.272,-9.12 v1(17.272,-8.192)
  Bottom Layer w0.254: R44.2@16.09,-8.192 v1(17.272,-8.192) C32.1@18.454,-8.192
LHTRIMUP: C33.1 K7.1 R46.2 | length 100.8
  Top Layer w0.254: K7.1@-64.75,-25 -62.5,-25 -56,-31.5 -27.182,-31.5 -19.177,-23.495 12.319,-23.495 17.272,-18.542 v1(17.272,-10.224)
  Bottom Layer w0.254: R46.2@16.09,-10.224 v1(17.272,-10.224) C33.1@18.454,-10.224
LVSTICK: C19.1 J3.2 R28.2 | length 80.3
  Top Layer w0.254: J3.2@-77,-6 -75.088,-6 -72.517,-3.429 -72.517,4.572 -62.556,14.533 -42.672,14.533 ; -40.822,14.533 -42.672,14.533 ; v1(-19.939,7.268) -19.939,12.065 -22.407,14.533 -42.672,14.533
  Bottom Layer w0.254: C19.1@-21.126,7.268 v1(-19.939,7.268) R28.2@-18.762,7.268
LVTRIMDWN: C26.1 K3.2 R34.2 | length 66
  Top Layer w0.254: K3.2@-29,-20.25 -25.673,-20.25 -23.952,-21.971 11.84,-21.971 15.74,-18.071 15.74,-4.187 17.272,-2.655 v1(17.272,-2.096)
  Bottom Layer w0.254: R34.2@16.09,-2.096 v1(17.272,-2.096) C26.1@18.454,-2.096
LVTRIMUP: C27.1 K1.1 R35.2 | length 87.8
  Top Layer w0.254: K1.1@-29,3.75 -29,-12.656 -26.162,-15.494 -26.162,-18.034 -22.987,-21.209 11.455,-21.209 14.986,-17.678 14.986,-3.036 17.272,-0.75 v1(17.272,-0.064)
  Bottom Layer w0.254: R35.2@16.09,-0.064 v1(17.272,-0.064) C27.1@18.454,-0.064
MENU: C35.2 K6.1 R10.1 | length 64.4
  Top Layer w0.254: v1(0.96,21.661) 0.96,19.528 5.77,14.718 5.77,10.85 2.191,7.271 2.191,1.365 6.156,-2.6 11.137,-2.6 13.3,-4.762 v1(13.3,-16) ; v1(9.754,-27) K6.1@10.75,-27
  Bottom Layer w0.254: R10.1@0.96,20.154 v1(0.96,21.661) ; C35.2@8.978,-26.924 9.054,-27 v1(9.754,-27) 13.3,-23.454 v1(13.3,-16)
NetC13_1: C13.1 U3.62 | length 16.2
  Bottom Layer w0.254: C13.1@-21.126,11.332 -14.38,11.332 -11.004,7.956 U3.62@-7.65,7.956 -8.956,7.956
NetP1_2: P1.2 Q1.2 | length 14.7
  Bottom Layer w0.254: Q1.2@32.956,34.544 32.956,45.133 P1.2@35.855,48.031
NetQ2_1: Q2.1 R4.1 R8.2 | length 5.1
  Bottom Layer w0.254: R8.2@19.392,25.768 19.392,28.448 21.206,28.448 Q2.1@21.628,28.026
NetR6_2: R6.2 U2.3 U2.13 | length 8.6
  Bottom Layer w0.254: R6.2@-29.267,27.589 U2.13@-26.599,27.589 ; U2.13@-26.091,27.589 -24.16,27.589 -23.51,26.939 U2.3@-20.899,26.939 U2.3@-20.391,26.939
NetR7_2: R7.2 U2.6 U2.10 | length 9.3
  Bottom Layer w0.254: R7.2@-29.678,25.146 -28.321,25.146 -27.828,25.639 U2.10@-26.599,25.639 ; U2.10@-26.091,25.639 -23.607,25.639 -22.957,24.989 U2.6@-20.899,24.989 U2.6@-20.391,24.989
NRST: C16.1 P3.5 R26.1 U3.20 | length 84.3
  Top Layer w0.254: P3.5@-54.864,28.956 -52.895,26.987 -23.533,26.987 v1(-3.702,7.156)
  Bottom Layer w0.254: v1(-3.702,7.156) U3.20@7.65,7.156 8.68,7.156 12.7,11.176 14.986,11.176 R26.1@16.002,10.16 ; R26.1@16.09,10.096 C16.1@18.454,10.096
PA0: R40.2 U3.51 | length 11.9
  Bottom Layer w0.254: R40.2@-17.062,-6.956 -15.719,-6.956 -9.607,-0.844 U3.51@-7.65,-0.844
PA1: R43.2 U3.50 | length 12.5
  Bottom Layer w0.254: R43.2@-17.062,-8.988 -16.227,-8.988 -8.883,-1.644 U3.50@-7.65,-1.644
PA2: R47.2 U3.49 | length 13
  Bottom Layer w0.254: R47.2@-17.062,-11.02 -8.486,-2.444 U3.49@-7.65,-2.444
PA3: R48.2 U3.48 | length 10.1
  Bottom Layer w0.254: R48.2@-11.074,-12.074 -11.074,-9.829 -6,-4.755 U3.48@-6,-4.094
PA4: R49.2 U3.47 | length 9.4
  Bottom Layer w0.254: R49.2@-8.61,-12.074 -8.61,-9.341 -5.193,-5.924 -5.193,-5.214 -5.2,-5.207 U3.47@-5.2,-4.094
PA5: R50.2 U3.46 | length 8.7
  Bottom Layer w0.254: R50.2@-6.146,-12.074 -6.146,-9.346 -4.4,-7.6 U3.46@-4.4,-4.094
PA6: R51.2 U3.45 | length 8
  Bottom Layer w0.254: R51.2@-3.682,-12.074 -3.6,-11.992 U3.45@-3.6,-4.094
PA7: R52.2 U3.44 | length 8.6
  Bottom Layer w0.254: U3.44@-2.8,-4.094 -2.8,-5.328 -1.218,-6.91 R52.2@-1.218,-12.074
PB0: J1.5 U2.1 U3.10 | length 58.6
  Top Layer w0.254: v1(-18.661,28.194) -4.467,14 v1(0.5,14) ; v1@-18.624,28.194 -18.624,29.876 -16,32.5 -16,44 -13.721,46.279 J1.5@-5.08,46.279
  Bottom Layer w0.254: U2.1@-20.391,28.239 -18.706,28.239 v1(-18.661,28.194) ; v1(0.5,14) 1.2,13.3 U3.10@1.2,11.206
PB1: P3.7 R10.2 U3.11 | length 74.9
  Top Layer w0.254: P3.7@-54.864,26.416 -24.663,26.416 -5.659,7.411 v1(-4.978,7.411)
  Bottom Layer w0.254: v1@-5.156,7.411 v1(-4.978,7.411) -3.29,9.1 1.1,9.1 2,10 U3.11@2,11.206 2,15 0.96,16.04 R10.2@0.96,18.454
PB2: R11.2 U3.12 | length 7.3
  Bottom Layer w0.254: U3.12@2.8,11.206 2.8,18.262 R11.2@2.992,18.454
PB3: R12.2 U3.13 | length 7.9
  Bottom Layer w0.254: U3.13@3.6,11.206 3.6,14.1 5.024,15.524 R12.2@5.024,18.454 R12.2@5.1,18.378
PB4: R13.2 U3.14 | length 8.3
  Bottom Layer w0.254: U3.14@4.4,11.206 4.4,13.4 7.056,16.056 R13.2@7.056,18.454
PB5: R15.2 U3.15 | length 8.9
  Bottom Layer w0.254: U3.15@5.2,11.206 5.2,12.918 9.088,16.806 R15.2@9.088,18.454
PB6: R14.2 U3.16 | length 9.4
  Bottom Layer w0.254: U3.16@6,11.206 6,12.5 11.12,17.62 R14.2@11.12,18.454
PB7: R23.2 U3.17 | length 8.6
  Bottom Layer w0.254: U3.17@7.65,9.556 8.806,9.556 13.41,14.16 R23.2@14.39,14.16
PC1: R57.2 U3.36 | length 12.4
  Bottom Layer w0.254: U3.36@3.6,-4.094 3.6,-5.835 7.315,-9.55 9.627,-9.55 11.101,-11.024 R57.2@11.101,-12.074
PC2: R56.2 U3.37 | length 10.4
  Bottom Layer w0.254: U3.37@2.8,-4.094 2.8,-6.237 R56.2@8.637,-12.074
PC3: R55.2 U3.38 | length 9.7
  Bottom Layer w0.254: U3.38@2,-4.094 2,-6.826 6.173,-10.999 R55.2@6.173,-12.074
PC4: R54.2 U3.39 | length 9
  Bottom Layer w0.254: U3.39@1.2,-4.094 1.2,-7.2 3.709,-9.709 R54.2@3.709,-12.074
PC5: R53.2 U3.40 | length 8.3
  Bottom Layer w0.254: U3.40@0.4,-4.094 0.4,-7.1 0.4,-8.096 1.245,-8.942 R53.2@1.245,-12.074
PD0: R30.1 U3.25 | length 7.1
  Bottom Layer w0.254: U3.25@7.65,3.156 12.3,3.156 13.144,4 R30.1@14.39,4
PD1: R32.1 U3.26 | length 6.9
  Bottom Layer w0.254: U3.26@7.65,2.356 10.852,2.356 11.24,1.968 R32.1@14.39,1.968
PD2: R35.1 U3.27 | length 7.4
  Bottom Layer w0.254: U3.27@7.65,1.556 10.382,1.556 12.002,-0.064 R35.1@14.39,-0.064
PD3: R34.1 U3.28 | length 7.9
  Bottom Layer w0.254: U3.28@7.65,0.756 9.912,0.756 12.764,-2.096 R34.1@14.39,-2.096
PD4: R38.1 U3.29 | length 8.4
  Bottom Layer w0.254: U3.29@7.65,-0.044 9.442,-0.044 13.526,-4.128 R38.1@14.39,-4.128
PD5: R41.1 U3.30 | length 8.9
  Bottom Layer w0.254: U3.30@7.65,-0.844 9.074,-0.844 R41.1@14.39,-6.16
PD6: R44.1 U3.31 | length 9.9
  Bottom Layer w0.254: U3.31@7.65,-1.644 8.644,-1.644 11.008,-4.008 12.268,-5.268 12.268,-6.07 R44.1@14.39,-8.192
PD7: R46.1 U3.32 | length 11
  Bottom Layer w0.254: U3.32@7.65,-2.444 8.444,-2.444 10.5,-4.5 11.582,-5.582 11.582,-7.416 R46.1@14.39,-10.224